# Altium PCB business_card.PcbDoc (part 2 of 2)
Units mil, origin at the board's own origin, x right, y up, seen from the top; angles counter-clockwise.
Board outline 3500 x 2000 mil, 2 copper layers (Top Layer, Bottom Layer); 64 components, 43 nets, 178 pads, 88 vias.
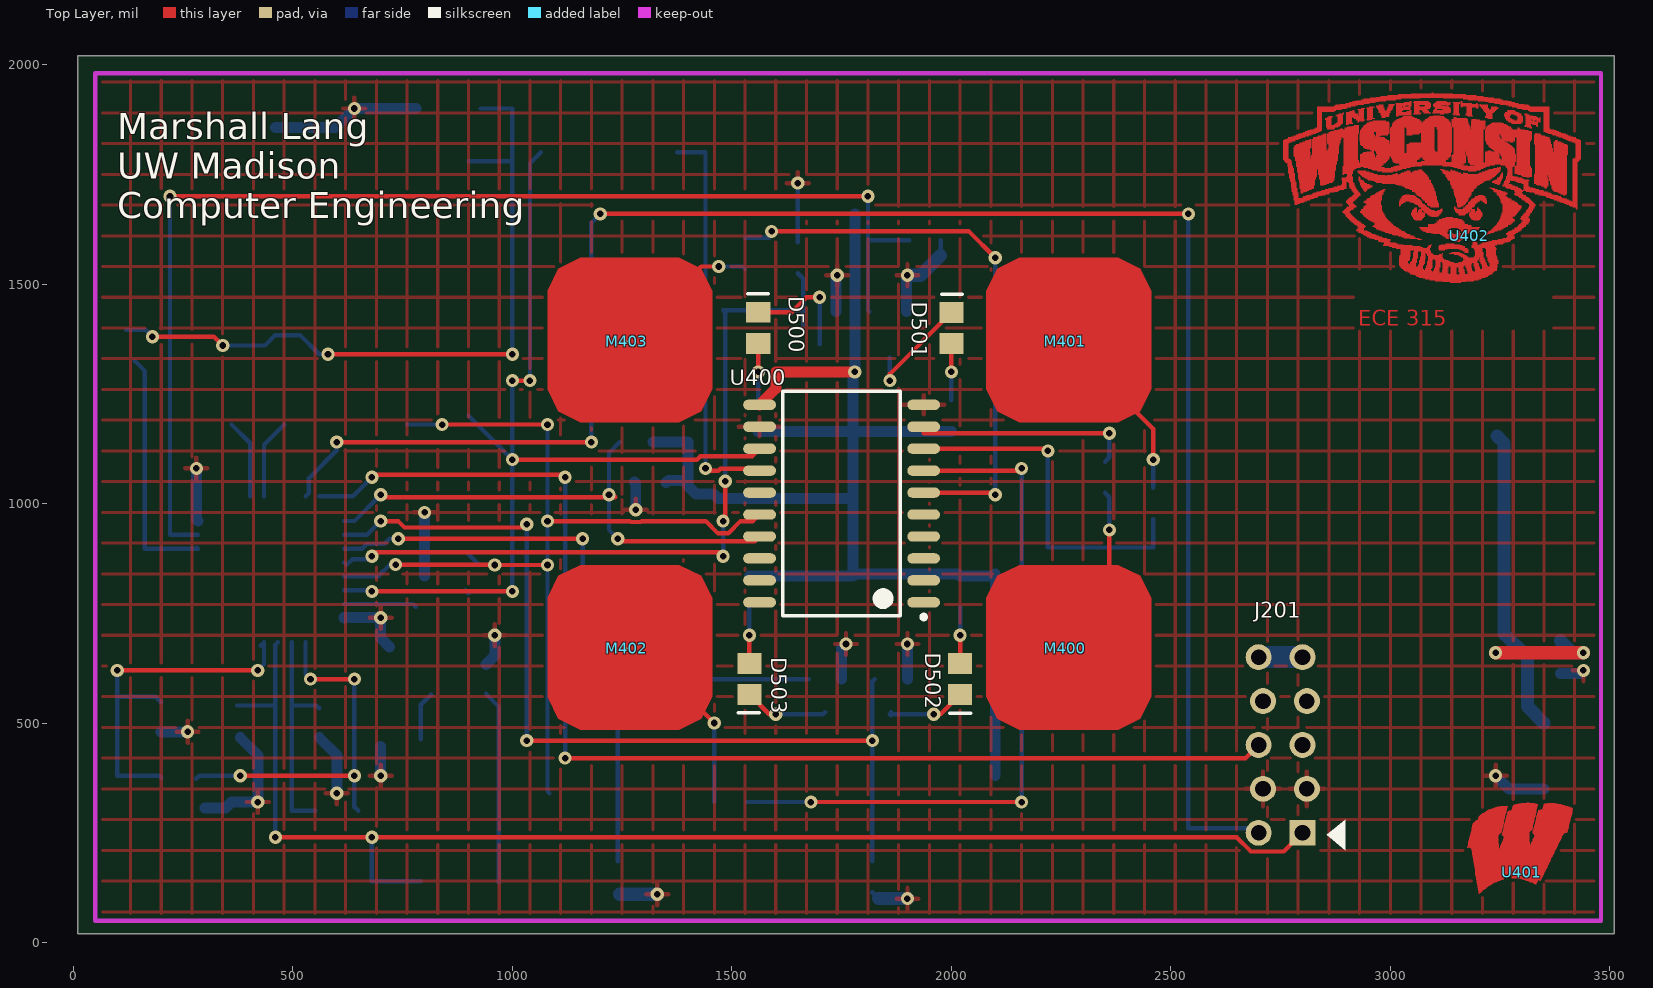
[diagram p0: Top Layer view]

## Via types
v1: diameter 30, hole 15, Top Layer to Bottom Layer, 88 vias

## Nets (pads, with @x,y where several pads share a name; then routed paths per layer and width w, separated by ;. In a path a pad name is that pad's centre, name@x,y a point inside that pad or via, vN(x,y) a via of type N, cw(c..) or ccw(c..) an arc to the next point about the centre after c; other vN are vias at no path point) (continued)
3V_VCC: (continued)
  Bottom Layer w25: R402.2@1320,1140 1400,1140 1400,1053 ; C400.1@1350.46,1048 1355.46,1053 1400,1053 ; R503.2 1775.43,835.43 ; R500.2 1775.43,1164.57 ; 1780,1660 v1(1780,1300) 1775.43,1295.43 1775.43,1164.57 ; R501.2 1775.43,1164.57 ; 2100,380 2100,840 2095.43,835.43 R502.2 2015.43,840 1780,840 1775.43,835.43 ; 1400,1053 1400,1040 1418,1022 1458.4,1022 1468.4,1012 1767.43,1012 1775.43,1020 ; 1775.43,835.43 1775.43,1020 ; 1775.43,1020 1775.43,1164.57
5V_PRG: J201.9 J201.10 | length 100
  Bottom Layer w50: J201.10 J201.9
BATT_NEG: J200.1 Q200.3 TP203.1 | length 698.3
  Bottom Layer w30: J200.1@3243,1154 3259,1138 3259,703.6 Q200.3 3312.6,537.4 TP203.1
BOOT0: R303.2 U300.31 | length 166.4
  Bottom Layer w10: U300.31 773.31,771.26 R303.2@780,764.57
BUZZER: R600.1 U300.14 | length 561.6
  Bottom Layer w10: R600.1@140,1324.57 162.76,1301.81 162.76,897.24 U300.14 U300.14@280.91,900
BUZZER_R: D600.1 PZ600.1 R600.2 TP600.1 | length 1655
  Top Layer w10: v1(180,1380) 320,1380 v1(340,1360) ; v1(580,1340) v1(1000,1340)
  Bottom Layer w10: R600.2 164.57,1395.43 v1(180,1380) ; v1(340,1360) 436.22,1360 PZ600.1 516.22,1383.78 560,1340 v1(580,1340) ; TP600.1 1000,1780 ; D600.1 1000,1900 1000,1780 ; v1(1000,1340) 1000,1780
G_EN: Q500.1 R504.2 U300.28 | length 1752
  Top Layer w10: v1(680,880) 689,889 1471,889 v1(1480,880) ; v1(1480,960) 1485,965 v1(1485,1051)
  Bottom Layer w10: U300.28 622.09,860 635.5,873.42 673.42,873.42 v1(680,880) ; v1(1480,880) v1(1480,960) ; v1(1485,1051) 1485,1435 1480,1440 1660,1440 1662.6,1437.4 ; R504.2 1662.6,1511.97 1662.6,1437.4 ; Q500.1 1662.6,1437.4
GND: C300.2 C301.2 C302.2 C303.2 C304.1 C305.1 C306.2 C400.2 D600.2 J201.3 J201.4 PZ600.2 Q200.2 Q500.2 Q501.2 Q502.2 Q503.2 R303.1 R504.1 R505.1 R506.1 R507.1 TP204.1 U300.16 U300.32 U400.10 U400.12 | length 2378.7
  Bottom Layer w10: R507.1 R507.1@1244.57,110 ; R504.1 v1(1650,1730) ; R506.1 R506.1@1834.57,100 ; 1975.43,1565.43 R505.1
  Bottom Layer w25: C306.2 v1(260,480) ; v1(280,1080) 280,963.9 U300.16 ; C305.1 346.54,306.54 360,320 v1(420,320) 420,426.54 C301.2 ; PZ600.2 596.22,1856.22 v1(640,1900) D600.2 ; C304.1 600,426.54 v1(600,340) ; U300.32 616.51,739.93 647.03,739.93 647.1,740 v1(700,740) 700,693.46 C302.2 ; v1(700,380) C303.2 ; R303.1@800,835.43 v1(800,980) ; C300.2 960,653.46 v1(960,700) ; C400.2 1281,1046.54 v1(1281,986) ; 1737.4,1437.4 v1@1737.4,1517.4 ; Q503.2 v1@1750,670 ; Q501.2@1897.4,1437.4 v1@1897.4,1517.4 ; Q502.2 v1(1900,680) ; v1(3240,380) 3270,350 TP204.1 ; Q200.2 v1@3432.6,612.6
  Bottom Layer w30: R507.1@1244.57,110 v1(1330,110) ; R506.1@1834.57,100 v1(1900,100) ; v1(1900,1520) 1930,1520 1975.43,1565.43
  other v1: 3440,620 1760,680 1740,1520
GRN_L: D500.1 Q500.3 | length 275.7
  Top Layer w10: D500.1 1635.74,1435.74 1670,1470 1690,1470 1700,1480 v1(1700,1470)
  Bottom Layer w10: 1700,1362.6 v1(1700,1470)
GRN_R: D500.2 R500.1 | length 129.4
  Top Layer w10: v1(1560,1300) D500.2
  Bottom Layer w10: R500.1 v1(1560,1300)
I2C1_SCLK: R301.1 R400.1 TP301.1 U300.29 U400.16 | length 2221.3
  Top Layer w10: v1(734,861) 959,861 v1(960,860) v1(1080,860) ; v1(840,1180) v1(1080,1180) ; v1(1080,960) 1267.4,960 1269.4,958 1292.6,958 1294.6,960 1440.4,960 1468.4,932 1491.6,932 1519.6,960 1547.99,960 U400.16
  Bottom Layer w10: U300.29 694.25,834.25 721,861 v1(734,861) ; TP301.1 v1(840,1180) ; R301.1 924.57,860 v1(960,860) ; v1(1080,1180) v1(1080,960) v1(1080,860) 1080,344.57 R400.1@1084.57,340
I2C1_SDA: R300.1 R401.1 TP300.1 U300.30 U400.13 | length 2274.3
  Top Layer w10: v1(680,800) v1(1000,800) ; v1(1000,1280) v1(1040,1280) ; v1@1005.5,1105.5 v1(1000,1100) 1420.4,1100 1428.4,1108 1545.99,1108 U400.13
  Bottom Layer w10: U300.30 677.24,802.76 v1(680,800) ; R300.1@892.68,802.76 R300.1 904.57,800 v1(1000,800) 1005.5,805.5 1000,811 v1(1000,1100) ; TP300.1@900,1200 TP300.1 v1(1000,1100) ; v1(1000,1280) v1(1000,1100) ; v1(1040,1280) 1040,1775.43 R401.1
KEY0: R407.1 U400.9 | length 506.7
  Top Layer w10: U400.9 1937.01,1160 v1(2360,1160)
  Bottom Layer w10: R407.1 2360,1105.43 v1(2360,1160)
KEY1: R406.1 U400.8 | length 809.9
  Top Layer w10: U400.8 2215,1125 v1(2220,1120)
  Bottom Layer w10: v1(2220,1120) 2220,900 2460,900 R406.1
KEY2: R405.1 U400.7 | length 1602.9
  Top Layer w10: v1(1680,320) v1(2160,320) ; U400.7 v1@2155,1075
  Bottom Layer w10: R405.1 v1(1680,320) ; v1(2160,320) v1(2160,1080)
KEY3: R404.1 U400.6 | length 1305.3
  Top Layer w10: v1(1590.43,1620) 2040,1620 v1(2100,1560) ; U400.6 2095,1025 v1(2100,1020)
  Bottom Layer w10: R404.1 1585.43,1605.43 ; v1(1590.43,1620) v1@1600.87,1620 ; v1(2100,1020) v1(2100,1560)
M400: M400.1 R407.2 | length 400.1
  Top Layer w10: M400.1 2360,770 v1(2360,940)
  Bottom Layer w10: R407.2 2360,1014.57 v1(2360,940)
M401: M401.1 R406.2 | length 417.1
  Top Layer w10: M401.1 2460,1170 v1(2460,1100)
  Bottom Layer w10: R406.2 v1(2460,1100)
M402: M402.1 R405.2 | length 450.4
  Top Layer w10: M402.1 1290,670 v1(1460,500)
  Bottom Layer w10: R405.2@1460,320 v1(1460,500)
M403: M403.1 R404.2 | length 342.7
  Top Layer w10: M403.1 1430,1540 v1(1470,1540)
  Bottom Layer w10: v1(1470,1540) 1524.57,1540 R404.2
NRST: C301.1 J201.1 U300.4 U301.3 | length 3115.1
  Top Layer w10: v1(460,240) v1(680,240) 2649.86,240 2682.38,207.47 2757.47,207.47 J201.1
  Bottom Layer w10: C301.1@373.46,540 460,540 ; v1(460,240) 460,540 ; U300.4 460,677.91 460,540 ; v1(680,240) 680,140 U301.3@791.42,140
O_EN: Q502.1 R506.2 U300.26 | length 2135.1
  Top Layer w10: v1(700,960) 739.6,960 754.1,945.5 1025.5,945.5 v1(1032.75,952.75) ; v1(1032.75,460) v1(1820,460)
  Bottom Layer w10: U300.26 668.74,928.74 v1(700,960) ; v1(1032.75,460) v1(1032.75,952.75) ; R506.2 v1(1820,460) 1820,594.8 Q502.1
ORN_L: D502.1 Q502.3 | length 186.4
  Top Layer w10: v1(1960,520) 1975.12,520 D502.1
  Bottom Layer w10: Q502.3@1860,520 Q502.3@1862.6,520 ; Q502.3@1862.6,517.4 Q502.3@1862.6,520 ; Q502.3 Q502.3@1862.6,520 ; v1(1960,520) Q502.3@1862.6,520
ORN_R: D502.2 R502.1 | length 128.8
  Top Layer w10: D502.2 v1(2020,700)
  Bottom Layer w10: v1(2020,700) R502.1
OSC_IN: C304.2 U300.3 X300.1 | length 502.7
  Bottom Layer w10: U300.3 497.24,540 ; X300.1 497.24,300 497.24,540 ; C304.2 553.46,540 497.24,540
OSC_OUT: C305.2 U300.2 X300.2 | length 854.8
  Top Layer w10: v1(380,380) v1(640,380) ; v1(540,600) v1(640,600)
  Bottom Layer w10: C305.2@280,373.46 286.54,380 v1(380,380) ; U300.2 528.74,611.26 v1(540,600) ; v1(640,600) v1(640,380) 640,309.21 X300.2
PA09: TP_PA09.1 U300.19 | length 181.4
  Bottom Layer w10: TP_PA09.1 402.76,1137.24 U300.19
PA10: TP_PA10.1 U300.20 | length 182.6
  Bottom Layer w10: U300.20 434.25,1134.25 TP_PA10.1
R_EN: Q501.1 R505.2 U300.15 | length 2783.2
  Top Layer w10: v1(220,1700) v1(1810,1700)
  Bottom Layer w10: v1(220,1700) 220,928.74 U300.15 ; v1(1810,1700) 1810,1600 ; Q501.1@1812.6,1437.4 1810,1440 1810,1600 ; R505.2 1810,1600
RED_L: D501.1 Q501.3 | length 266
  Top Layer w10: v1(1860,1280) 1860,1295.43 D501.1
  Bottom Layer w10: v1(1860,1280) Q501.3@1860,1332.6
RED_R: D501.2 R501.1 | length 129.1
  Top Layer w10: v1(2000,1300) D501.2
  Bottom Layer w10: R501.1 v1(2000,1300)
RESET: R403.1 U400.14 | length 912.9
  Top Layer w10: v1(1440,1080) 1445,1075 1469.4,1075 1473.4,1079 1558.99,1079 U400.14
  Bottom Layer w10: R403.1 1440,1800 v1(1440,1080)
SW1: C300.1 U301.1 U301.2 | length 441.8
  Bottom Layer w10: C300.1 968.58,537.95 U301.2 U301.1
SW2: R302.1 U301.4 | length 111.2
  Bottom Layer w10: U301.4 791.42,541.42 814.57,564.57 R302.1
SWCLK: J201.6 U300.24 | length 2814.8
  Top Layer w10: v1(680,1060) 685.5,1065.5 1114.5,1065.5 v1(1120,1060) ; v1(1120,420) 2670,420 J201.6
  Bottom Layer w10: U300.24 636.34,1016.34 v1(680,1060) ; v1(1120,420) v1(1120,1060)
SWDIO: J201.2 U300.23 | length 4165.6
  Top Layer w10: v1(600,1140) v1(1180,1140) ; v1(1200,1660) v1(2540,1660)
  Bottom Layer w10: U300.23 536.41,1024.01 536.41,1057.88 600,1121.47 v1(600,1140) ; v1(1180,1140) 1180,1640 v1(1200,1660) ; v1(2540,1660) 2540,260 2690,260 J201.2
TOUCH_IRQ: R402.1 U300.25 U400.17 | length 1230.5
  Top Layer w10: v1(700,1020) 705.5,1014.5 1234.5,1014.5 1229,1020 v1(1220,1020) ; v1(1240,920) 1246,914 1551.99,914 U400.17
  Bottom Layer w10: U300.25 640.24,960.24 v1(700,1020) ; v1(1240,920) 1220,940 v1(1220,1020) 1220,1115.43 R402.1
Y_EN: Q503.1 R507.2 U300.27 | length 1802.9
  Top Layer w10: v1(740,920) v1(1160,920)
  Bottom Layer w10: U300.27 657.65,897.24 668.4,908 708,908 720,920 v1(740,920) ; v1(1160,920) 1160,600 1240,600 ; R507.2 1240,600 ; Q503.1 1240,600
YEL_L: D503.1 Q503.3 | length 193.3
  Top Layer w10: D503.1 1584.88,520 v1(1600,520)
  Bottom Layer w10: v1(1600,520) 1707.4,520 Q503.3
YEL_R: D503.2 R503.1 | length 128.8
  Top Layer w10: D503.2 v1(1540,700)
  Bottom Layer w10: v1(1540,700) R503.1
pads on no net: J201.5 U300.6 U300.7 U300.8 U300.9 U300.10 U300.11 U300.12 U300.13 U300.18 U300.21 U300.22 U400.1 U400.2 U400.3 U400.4 U400.5 U400.15 U400.18 U400.19 U400.20

## Polygon pours and split planes (outlines as drawn)
GND on Top Layer "GND_L01_P004" (hatched 90Degree grid 70 track 7, remove dead copper, pour order 4): 0,2050 0,0 3550,0 3550,2050
3V_VCC on Bottom Layer "3V_VCC_L02_P014" (solid, remove dead copper, pour order 14): 0,0 0,2050 3550,2050 3550,0
3V_BATT on Bottom Layer "3V_BATT_L02_P008" (solid, pour order 8): 3450,110 3450,270 3250,270 3250,970 2660,970 2650,980 2650,1730 3230,1730 3230,1950 2580,1950 2570,1940 2570,740 3090,740 3090,310 3220,310 3220,110
3.3V_PRG on Bottom Layer "3.3V_PRG_L02_P012" (solid, remove dead copper, pour order 12): 3000,80 3000,360 3000,740 2870,740 2870,600 2640,600 2640,500 2860,500 2860,80

## Keep-outs
Keep-Out Layer:
  lines w10: 50,50 50,1980 3480,1980 3480,50 50,50

## Other copper
Bottom Layer:
  pour cut-out: 1040,1620 1040,410 2500,410 2500,1620

## Silkscreen, mask and mechanical layers (free items; w line width, h text height)
Top Overlay:
  text "Marshall Lang / UW Madison / Computer Engineering" at 100,1650 h60
Bottom Overlay:
  text "I2C1_SDA" at 905,1285 h35 r270
  text "I2C1_SCLK" at 775,1280 h35 r270
  text "BATT_NEG" at 3461,602 h20 r90
  text "GND" at 3459,379 h20 r90
  text "3V_BATT" at 3460,255 h20 r90
  text "3.3V_PRG" at 3043,78 h35
  text "3V_VCC" at 3299,76 h35
Mechanical 2:
  lines w10: 0,0 3530,0 3530,2030 0,2030 0,0
Mechanical 7:
  lines w10: 10,2485 10,2520

## Dimensions
0,0 to 3530,0 on Mechanical 7
0,0 to 0,2030 on Mechanical 7

## Text inside footprints (layer, text, board x,y; h text height)
U402: Top Solder "ECE 315" at 2927.05,1404.58 h35; Top Layer "ECE 315" at 2927.05,1404.58 h35